# EAGLE board GPS_radiologger_v5 (EAGLE 9.5.1)
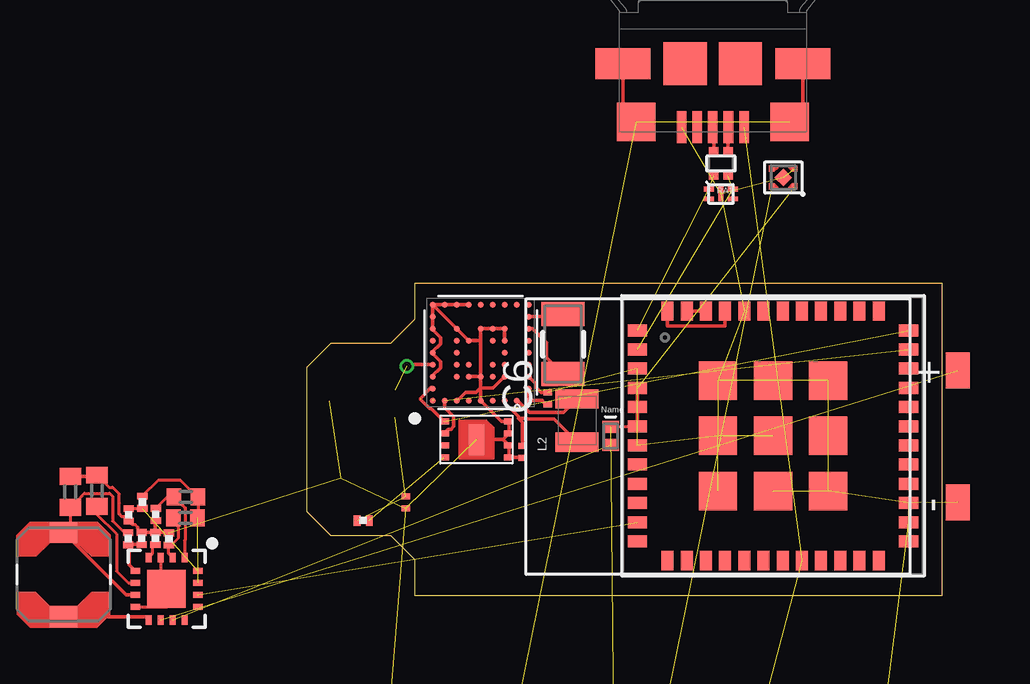
[diagram p0: board, top side]
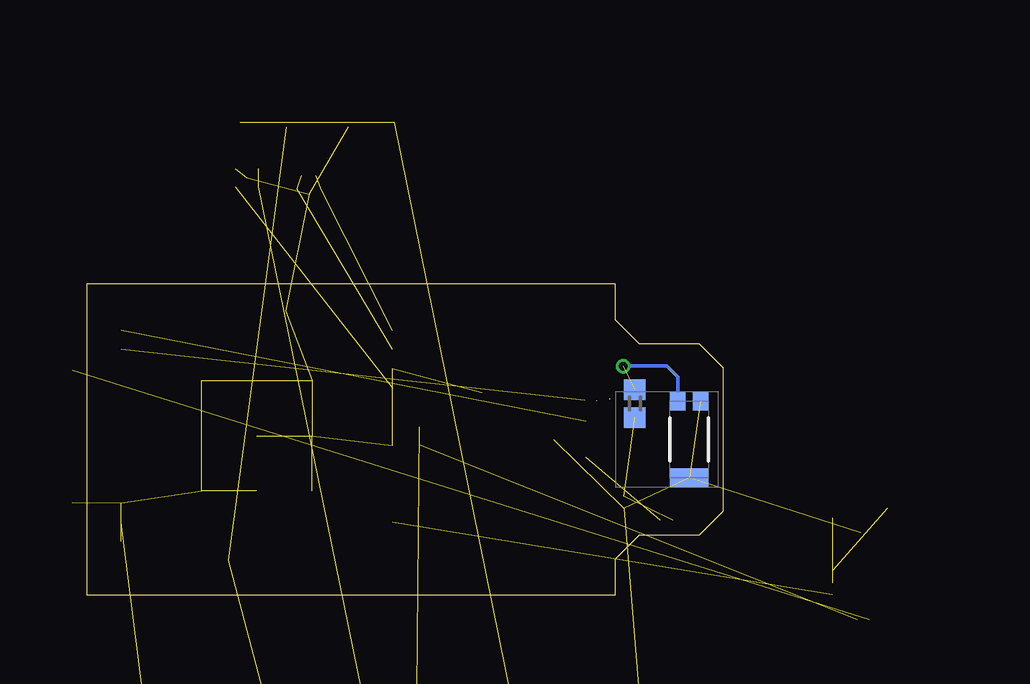
[diagram p1: board, bottom side, seen from below]

Size 26.5 x 13 mm. Coordinates in mm from the lower left corner, seen from the top.
Outline: 4.5,0 26.5,0 26.5,13 4.5,13 4.5,11.5 3.5,10.5 1,10.5 0,9.5 0,3.5 1,2.5 3.5,2.5 4.5,1.5 4.5,0
Copper layers (1*16): Top 0.035mm / dielectric 1.5mm / Bottom 0.035mm
Design rules "default *": minimum track width 5mil, minimum drill 0.25mm, track to track 5mil, track to pad 5mil, pad to pad 5mil, via to via 5mil, smd to smd 5mil, copper to edge 20mil, drill to drill 3mil, minimum pad ring 10mil, minimum via ring 5mil, stop-mask expansion 4mil, vias tented up to drill 0mil, thermal gap 10mil
Net classes: 1 vcc: width 0 mm

## Footprints (pad centres in the part's own frame; a part is rotated, then mirrored left to right if it is on the bottom)
C0201 = smd 0.25 x 0.35: 1 -0.25,0; 2 0.25,0
C0402 = smd 0.7 x 0.9: 1 -0.65,0; 2 0.65,0
0402-CAP = smd 0.5 x 0.9: 1 -0.55,0; 2 0.55,0
CDSQR4148-HF = smd 0.7 x 0.5: P$1 0,0.375; P$2 0,-0.375
USBULC6-2N4 = smd 0.2 x 0.4: P$1 0.2,0.5; P$2 -0.2,0.5; P$3 -0.2,-0.5; P$4 0.2,-0.5 | smd 0.6 x 0.2: P$5 0,0
0402 = smd 0.85 x 0.9: 1 -0.58,0; 2 0.58,0
1981584-1 = smd 0.4 x 1.35: 1 -1.3,4.1; 2 -0.65,4.1; 3 0,4.1; 4 0.65,4.1; 5 1.3,4.1 | smd 1.8 x 1.8: M1 -1.15,1.45; M2 1.15,1.45 | smd 2.3 x 1.3: S1 -3.75,1.45; S2 3.75,1.45 | smd 1.6 x 1.6: S3 -3.2,3.885; S4 3.2,3.885
0402' = smd 0.5 x 0.9: 1 -0.55,0; 2 0.55,0
0806 = smd 0.8 x 1.8: 1 -0.9,0; 2 0.9,0
IND_LPS4012-103MRB = smd 0.87 x 1.15: 1 -1.765,0; 2 1.765,0
R0201 = smd 0.28 x 0.43: 1 -0.255,0; 2 0.255,0
EXB24V = smd 0.4 x 0.36: P$1 -0.3,0.5; P$2 0.3,0.5; P$3 -0.3,-0.5; P$4 0.3,-0.5
R0402 = smd 0.6 x 0.7: 1 -0.5,0; 2 0.5,0
TYPEABZ = smd 0.8 x 0.5: P$1 -5.65,4.4; P$2 -5.65,3.6; P$3 -5.65,2.8; P$4 -5.65,2; P$5 -5.65,1.2; P$6 -5.65,0.4; P$7 -5.65,-0.4; P$8 -5.65,-1.2; P$9 -5.65,-2; P$10 -5.65,-2.8; P$11 -5.65,-3.6; P$12 -5.65,-4.4; P$25 5.65,-4.4; P$26 5.65,-3.6; P$27 5.65,-2.8; P$28 5.65,-2; P$29 5.65,-1.2; P$30 5.65,-0.4; P$31 5.65,0.4; P$32 5.65,1.2; P$33 5.65,2; P$34 5.65,2.8; P$35 5.65,3.6; P$36 5.65,4.4 | smd 0.5 x 0.8: P$13 -4.4,-5.2; P$14 -3.6,-5.2; P$15 -2.8,-5.2; P$16 -2,-5.2; P$17 -1.2,-5.2; P$18 -0.4,-5.2; P$19 0.4,-5.2; P$20 1.2,-5.2; P$21 2,-5.2; P$22 2.8,-5.2; P$23 3.6,-5.2; P$24 4.4,-5.2; P$37 4.4,5.2; P$38 3.6,5.2; P$39 2.8,5.2; P$40 2,5.2; P$41 1.2,5.2; P$42 0.4,5.2; P$43 -0.4,5.2; P$44 -1.2,5.2; P$45 -2,5.2; P$46 -2.8,5.2; P$47 -3.6,5.2; P$48 -4.4,5.2 | smd 1.6 x 1.6: P$49 -2.3,2.3; P$50 0,2.3; P$51 2.3,2.3; P$52 -2.3,0; P$53 0,0; P$54 2.3,0; P$55 -2.3,-2.3; P$56 0,-2.3; P$57 2.3,-2.3
UBLOX_ZOE_M8-0-10 = smd 0.25 x 0.25: 1 -1.996,2.004; 2 -1.496,2.004; 3 -0.996,2.004; 4 -0.496,2.004; 5 0.004,2.004; 6 0.504,2.004; 7 1.004,2.004; 8 1.504,2.004; 9 2.004,2.004; 10 2.004,1.504; 11 2.004,1.004; 12 2.004,0.504; 13 2.004,0.004; 14 2.004,-0.496; 15 2.004,-0.996; 16 2.004,-1.496; 17 2.004,-1.996; 18 1.504,-1.996; 19 1.004,-1.996; 20 0.504,-1.996; 21 0.004,-1.996; 22 -0.496,-1.996; 23 -0.996,-1.996; 24 -1.496,-1.996; 25 -1.996,-1.996; 26 -1.996,-1.496; 27 -1.996,-0.996; 28 -1.996,-0.496; 29 -1.996,0.004; 30 -1.996,0.504; 31 -1.996,1.004; 32 -1.996,1.504; 33 -0.996,1.004; 34 -0.496,1.004; 35 0.004,1.004; 36 0.504,1.004; 37 1.004,1.004; 38 1.004,0.004; 39 1.004,-0.496; 40 1.004,-0.996; 41 0.504,-0.996; 42 0.004,-0.996; 43 -0.496,-0.996; 44 -0.996,-0.996; 45 -0.996,-0.496; 46 -0.996,0.004; 47 -0.996,0.504; 48 -0.496,0.504; 49 0.504,0.504; 50 0.504,-0.496; 51 -0.496,-0.496
NCP161 = smd 0.24 x 0.24: P$1 -0.37,-0.48; P$2 0.37,-0.48; P$3 0.37,0.48; P$4 -0.37,0.48 | smd 0.52 x 0.52 rotated 45: P$5 0,0
GMB301016 = smd 1.5 x 1: + -2.75,10; - 2.75,10
8-SON_2X3 = smd 0.25 x 0.4: P$1 0.75,-1.35; P$2 0.25,-1.35; P$3 -0.25,-1.35; P$4 -0.75,-1.35; P$5 -0.75,1.35; P$6 -0.25,1.35; P$7 0.25,1.35; P$8 0.75,1.35 | smd 1.27 x 0.635: P$9 0,0
LFCSP-16-3X3 = smd 0.4 x 0.25: 1 -1.3,0.75; 2 -1.3,0.25; 3 -1.3,-0.25; 4 -1.3,-0.75; 9 1.3,-0.75; 10 1.3,-0.25; 11 1.3,0.25; 12 1.3,0.75 | smd 0.25 x 0.4: 5 -0.75,-1.3; 6 -0.25,-1.3; 7 0.25,-1.3; 8 0.75,-1.3; 13 0.75,1.3; 14 0.25,1.3; 15 -0.25,1.3; 16 -0.75,1.3 | smd 1.6 x 1.6: EXP 0,0
CRYSTAL-SMD-3.2X1.5MM = smd 1 x 1.8: P$1 -1.25,0; P$2 1.25,0
W3011 = smd 0.8 x 0.65: 1 1.6,0.475; 2 1.6,-0.475 | smd 0.8 x 1.6: 3 -1.6,0

## Placement (x,y rotation side)
C1  47 pF  [C0201]  4.13,3.88 270 top
C2  10 uF  [C0201]  4.97,-30.52 0 top  (outside the outline)
C3  10 uF  [C0201]  7.57,-30.52 0 top  (outside the outline)
C5  4.7 uF  [C0201]  9,5.98 270 top
C6  0.1 uF  [C0201]  10.05,8.21 90 top
C7  100 nF  [C0201]  12.78,-30.52 0 top  (outside the outline)
C9  1 uF  [C0201]  15.38,-30.52 0 top  (outside the outline)
C10  0.1 uF  [C0201]  17.99,-30.52 0 top  (outside the outline)
C11  0.1 uF  [C0201]  20.59,-30.52 0 top  (outside the outline)
C12  10 uF  [C0201]  23.19,-30.52 0 top  (outside the outline)
C13  100 nF  [C0201]  1.59,-33.46 0 top  (outside the outline)
C14  4.7uF  [C0402]  -9.86,4.32 90 top  (outside the outline)
C15  10uF  [C0402]  -8.75,4.37 90 top  (outside the outline)
C17  1 uF  [0402-CAP]  -2.78,-73.82 0 top  (outside the outline)
C18  1 uF  [0402-CAP]  -0.18,-73.82 0 top  (outside the outline)
D1  CDSQR4148-HF  [CDSQR4148-HF]  1.65,-70.01 0 top  (outside the outline)
D2  CDSQR4148-HF  [CDSQR4148-HF]  12.67,6.65 0 top
D4  USBULC6-2N4  [USBULC6-2N4]  17.27,16.74 90 top  (outside the outline)
FB1  FERRITE_BEAD-120_OHM-0402  [0402]  3.68,8 270 bottom
J1  1981584-1  [1981584-1]  16.93,23.63 180 top  (outside the outline)
L1  BLM15HB121SN1  [0402']  -7.59,-87.87 0 top  (outside the outline)
L2  2.2uH  [0806]  11.27,7.29 90 top
L3  BLM15HB121SN1  [0402']  1.5,-21.93 0 top  (outside the outline)
L4  BLM15HB121SN1  [0402']  1.5,-26.81 0 top  (outside the outline)
L5  22 uH  [IND_LPS4012-103MRB]  -10.14,0.87 270 top  (outside the outline)
R1  10  [R0201]  2.35,3.13 0 top
R2  6.34M  [R0201]  -7.45,2.37 90 top  (outside the outline)
R3  14.7M  [R0201]  -6.88,2.38 270 top  (outside the outline)
R4  20k  [R0201]  -6.31,2.38 270 top  (outside the outline)
RA1  EXB24V  [EXB24V]  17.26,18.01 180 top  (outside the outline)
RPG1  [R0201]  -6.85,3.89 90 top  (outside the outline)
RPG2  [R0201]  -7.42,3.36 90 top  (outside the outline)
RSD1  [R0402]  -5.04,4.11 0 top  (outside the outline)
RSD2  [R0201]  -6.29,3.38 90 top  (outside the outline)
RTERM1  [R0402]  -5.06,3.24 0 top  (outside the outline)
RTERM2  [R0201]  -5.75,2.36 270 top  (outside the outline)
U1  TYPEABZ  [TYPEABZ]  19.44,6.66 0 top
U2  UBLOX_ZOE_M8-0-10  [UBLOX_ZOE_M8-0-10]  7.26,10.12 90 top
U5  NCP161  [NCP161]  19.86,17.43 90 top  (outside the outline)
U$1  GMB301016  [GMB301016]  17.15,6.63 270 top
U$2  MB85RC64TA  [8-SON_2X3]  7.07,6.5 90 top
U$3  ADP5090  [LFCSP-16-3X3]  -5.85,0.28 270 top  (outside the outline)
Y1  32.768kHz  [CRYSTAL-SMD-3.2X1.5MM]  10.69,10.48 90 top
Y2  W3011  [W3011]  1.41,6.51 90 bottom

## Library data of the parts
C1-C3 C5-C7 C9-C13 = rcl; SPICEPREFIX: C
C14 C15 R2-R4 RPG1 RPG2 RSD2 RTERM2 = resistor
C17 C18 = SparkFun-Capacitors
D1 D2 D4 RA1 U1 U5 = Kris
FB1 = SparkFun-Coils; MFG_PART: BLM15HB121SN1D; PROD_ID: NDUC-14206
J1 = con-usb; MF: Hirose; MPN: ZX62-AB-5PA(11)
L1 L3 L4 = inductors
L2 = SparkFun-Coils; PROD_ID: NDUC-14257
L5 = LPS4012-103MRB; AVAILABILITY: Unavailable; DESCRIPTION: Power inductor, shielded, 20/30% tol, SMT, RoHS, lead-free, halogen-free; MF: Coilcraft; MP: LPS4012-103MRB; PACKAGE: None; PRICE: None
R1 RSD1 RTERM1 = rcl; SPICEPREFIX: R
U2 = SparkFun-GPS; PROD_ID: IC-14251
U$1 = Powerstream
U$2 = Fujitsu_FRAM
U$3 = ADP5090_LFCSP-16-3X3
Y1 = SparkFun-Clocks; PROD_ID: XTAL-13062
Y2 = SparkFun-GPS; PROD_ID: ANT-14304

## Nets
3.3V: R1.2 U$2.P$5
!INT: U2.43
!RESET: U2.20
!RST: U1.P$34
!SAFEBOOT: U2.34
A0: U1.P$22
ANT: C11.1 L4.1
BAT: U$1.+ U$3.10
BCKP: U2.16
BTN: U1.P$43
D0: U1.P$18
D1: U1.P$19
D_SEL: U2.48
DIS_SW: U1.P$11 U$3.14
DM: D4.P$4 RA1.P$1 U1.P$2
DP: D4.P$1 RA1.P$2 U1.P$1
GND: C1.2 C2.1 C3.1 C5.2 C6.2 C7.1 C9.1 C10.1 C12.1 C13.1 C14.2 C15.2 C17.2 C18.2 D4.P$5 J1.5 L1.2 L3.2 L4.2 R3.1 R4.1 RPG2.1 RSD2.1 RTERM2.1 U1.P$3 U1.P$7 U1.P$25 U1.P$27 U1.P$44 U1.P$49 U1.P$50 U1.P$51 U1.P$52 U1.P$53 U1.P$54 U1.P$55 U1.P$56 U1.P$57 U2.1 U2.3 U2.5 U2.7 U2.8 U2.9 U2.10 U2.11 U2.12 U2.17 U2.23 U2.29 U2.31 U2.37 U2.38 U2.39 U2.40 U2.41 U2.44 U2.46 U2.47 U2.49 U5.P$2 U5.P$5 U$1.- U$2.P$1 U$2.P$2 U$2.P$3 U$2.P$4 U$2.P$9 Y2.2 Y2.3
GPS_ANT: FB1.1 U2.4 Y2.1
GPS_V: C6.1 U2.24 U2.25
ID: J1.4
N$1: U1.P$45 U1.P$48
N$3: U$2.P$6
N$4: L2.2 U2.26
N$5: L5.2 U$3.9
N$6: U$3.3 U$3.8 U$3.EXP
N$7: R2.1 R3.2 U$3.5
N$8: C15.1 U$3.6
N$9: C1.1 FB1.2 R1.1
N$10: R4.2 U$3.4
N$11: RTERM1.1 RTERM2.2 U$3.2
N$12: RPG1.1 RPG2.2 U$3.16
N$13: C5.1 L2.1 U2.27
N$14: U2.18 Y1.P$2
N$15: U2.19 Y1.P$1
N$16: RSD1.1 RSD2.2 U$3.1
N$17: RPG1.2 RSD1.2 RTERM1.2 U$3.15
N$31: J1.3 RA1.P$4
N$32: C11.2 L3.1 U1.P$26
N$33: J1.2 RA1.P$3
N$60: C17.1 D1.P$1 U5.P$3 U5.P$4
PGOOD: U$3.13
RXI/MOSI: U2.22
SCL: U1.P$35 U2.32 U$2.P$7
SDA: U1.P$36 U2.2 U$2.P$8
SOLAR_3V3: D2.P$2 U$3.11
SWDCLK: U1.P$42
SWDIO: U1.P$41
SYS_3V3: C2.2 C3.2 C7.2 C9.2 C10.2 C12.2 C13.2 C18.1 D2.P$1 U1.P$4 U1.P$5 U1.P$6 U5.P$1
TCXO_OUT: U1.P$46 U1.P$47
TIMEPULSE: U2.33
TXO/MISO: U2.21
USB_SHIELD: J1.S1 J1.S2 J1.S3 J1.S4 L1.1
VBUS: D1.P$2 J1.1 U1.P$20
VIN: C14.1 L5.1 R2.2 U$3.7
VREF+: U1.P$32

## Tracks (layer width: path | path; a pad name or v marks a point on that pad's centre or on a via)
3.3V  (1 unrouted)
ANT  (1 unrouted)
BAT  (1 unrouted)
DIS_SW  (1 unrouted)
DM  (2 unrouted)
DP  (2 unrouted)
GND  (36 unrouted)
  Top 0.127: C15.2 -8.24,4.51 -8.1,4.51 -7.81,4.23 -7.81,3.85 -7.83,3.83 -7.83,3.4 -7.72,3.29 -7.6,3.29 RPG2.1 -7.27,2.95 -7.15,2.95 -7.04,2.84 -7.04,2.79 R3.1
  Top 0.152: 7.25,10.68 U2.38 U2.39 U2.40 U2.41 | 7.25,10.68 U2.46 | U2.46 U2.47 | 7.25,10.68 7.21,10.63 U2.49 U2.37 U2.9 | U2.46 7.25,8.64 | 7.25,8.64 U2.29 8.13,7.25 U$2.P$1 U$2.P$2 8.18,6.5 | 7.25,8.64 7.77,8.64 U2.44 | 7.25,8.64 7.06,8.46 6.62,8.46 6.29,8.13 U2.31 6.22,8.13 | U2.9 U2.10 U2.12 | U2.9 U2.8 U2.7 5.25,11.09 5.58,10.76 5.58,10.49 5.25,10.16 U2.5 5.25,10.09 5.58,9.76 5.58,9.49 5.25,9.16 U2.3 | 5.29,8.13 5.28,8.13 | 8.18,6.5 U$2.P$9 | 8.18,6.5 U$2.P$3 U$2.P$4 8.98,5.75 C5.2 | U2.23 9.58,8.8 9.58,8.65 9.77,8.46 C6.2 | C14.2 -8.79,4.97 C15.2 -8.49,4.76 | R4.1 R3.1 | R3.1 | RSD2.1 -6.31,3.1 R4.1 | RPG2.1 | R4.1 -5.77,2.63 RTERM2.1
GPS_ANT  (via drill 0.35)  (1 unrouted)
  Top 0.152: U2.4 4.48,9.63 4.41,9.56 v4.17,9.56
  Bottom 0.152: v4.17,9.56 2.34,9.56 1.88,9.11 Y2.1
GPS_V
  Top 0.152: U2.24 U2.25 9.79,8.13 | 9.84,8.13 9.79,8.13 | C6.1 9.96,7.96 9.79,8.13
N$1
  Top 0.152: U1.P$45 17.44,11.23 15.04,11.23 U1.P$48
N$4
  Top 0.152: U2.26 8.79,8.13 9.28,7.63 10.71,7.63 L2.2
N$5
  Top 0.152: U$3.9 -6.6,-0.89 L5.2
N$6
  Top 0.127: U$3.3 -6.1,0.28 | U$3.8 -5.85,-0.47
  Top 0.152: -6.1,0.28 U$3.EXP -5.85,-0.47
N$7
  Top 0.152: U$3.5 -7.4,1.28 -7.4,2.11 R2.1 -7.44,2.12 R3.2
N$8
  Top 0.127: -8.71,3.68 -8.71,3.35 -7.93,2.57 -7.93,1.01 -7.45,0.53 U$3.6
  Top 0.152: -8.71,3.68 C15.1
N$9  (2 unrouted)
N$10
  Top 0.127: U$3.4 -6.43,1.75 -6.43,2.09
  Top 0.152: R4.2 -6.38,2.05 -6.43,2.09 | U$3.4 -6.6,1.67
N$11
  Top 0.127: U$3.2 -5.75,1.73 RTERM2.2 -5.73,2.09 -5.65,2.09 -5.34,2.4 -5.34,2.83 -5.56,3.05 RTERM1.1
  Top 0.152: -5.68,2.17 RTERM2.2
N$12  (1 unrouted)
  Top 0.127: RPG2.2 -7.4,3.63 RPG1.1
  Top 0.152: RPG2.2 -7.39,3.62
N$13
  Top 0.152: U2.27 8.25,8.04 8.83,7.46 8.83,7.38 | C5.1 9,7.21 8.83,7.38 | 8.83,7.38 9.14,7.38 9.17,7.35 10.31,7.35 L2.1
N$14
  Top 0.152: Y1.P$2 10.58,11.63 U2.18
N$15
  Top 0.152: Y1.P$1 10,9.92 10,10.54 9.42,11.13 U2.19
N$16
  Top 0.127: RSD2.2 -5.81,4.11 RSD1.1 -5.2,3.77 -5.17,3.77 -5.06,3.66 -5.06,2.32 -5.1,2.29 U$3.1
N$17  (1 unrouted)
  Top 0.127: -4.62,4.11 RSD1.2 | RTERM1.2 -4.54,3.26 RSD1.2 | RSD1.2 -4.57,4.11 -5.26,4.79 -6.2,4.79 RPG1.2
  Top 0.152: -4.57,3.25 RTERM1.2
N$31
  Top 0.152: RA1.P$4 16.96,19.49 J1.3
N$32  (2 unrouted)
N$33
  Top 0.152: J1.2 17.56,19.51 RA1.P$3
N$60  (3 unrouted)
SCL  (1 unrouted)
  Top 0.152: U2.32 5.75,7.84 6.13,7.46 6.13,7.04 6.01,6.92 5.9,6.92 U$2.P$7
SDA  (2 unrouted)
  Top 0.152: 4.73,8.18 5.12,7.8 5.18,7.8 U$2.P$8 | U2.2 5.19,8.63 5.19,8.66 4.73,8.21
SOLAR_3V3  (1 unrouted)
SYS_3V3  (9 unrouted)
  Top 0.127: U1.P$6 13.76,7.03 D2.P$1
  Top 0.152: U1.P$4 U1.P$5 U1.P$6
TCXO_OUT
  Top 0.152: U1.P$47 U1.P$46
USB_SHIELD  (2 unrouted)
  Top 0.152: J1.S2 13.18,20.29 J1.S4 | J1.S1 20.68,20.29 J1.S3
VBUS  (2 unrouted)
VIN
  Top 0.127: -7.6,2.62 R2.2 -7.6,2.62 -8.09,3.11 -8.09,4.13 -8.22,4.26 -9.28,4.26 -9.39,4.15 -9.39,4.14 C14.1 -9.86,2.92
  Top 0.152: U$3.7 -7.53,0.03 L5.1 -9.86,2.92